# Altium PCB Glucometer-InstrumentationCircuit.PcbDoc
Units mm, origin at the board's own origin, x right, y up, seen from the top; angles counter-clockwise.
Board outline 24.26 x 43.36 mm, 2 copper layers (Top Layer, Bottom Layer); 11 components, 11 nets, 50 pads, 0 vias.
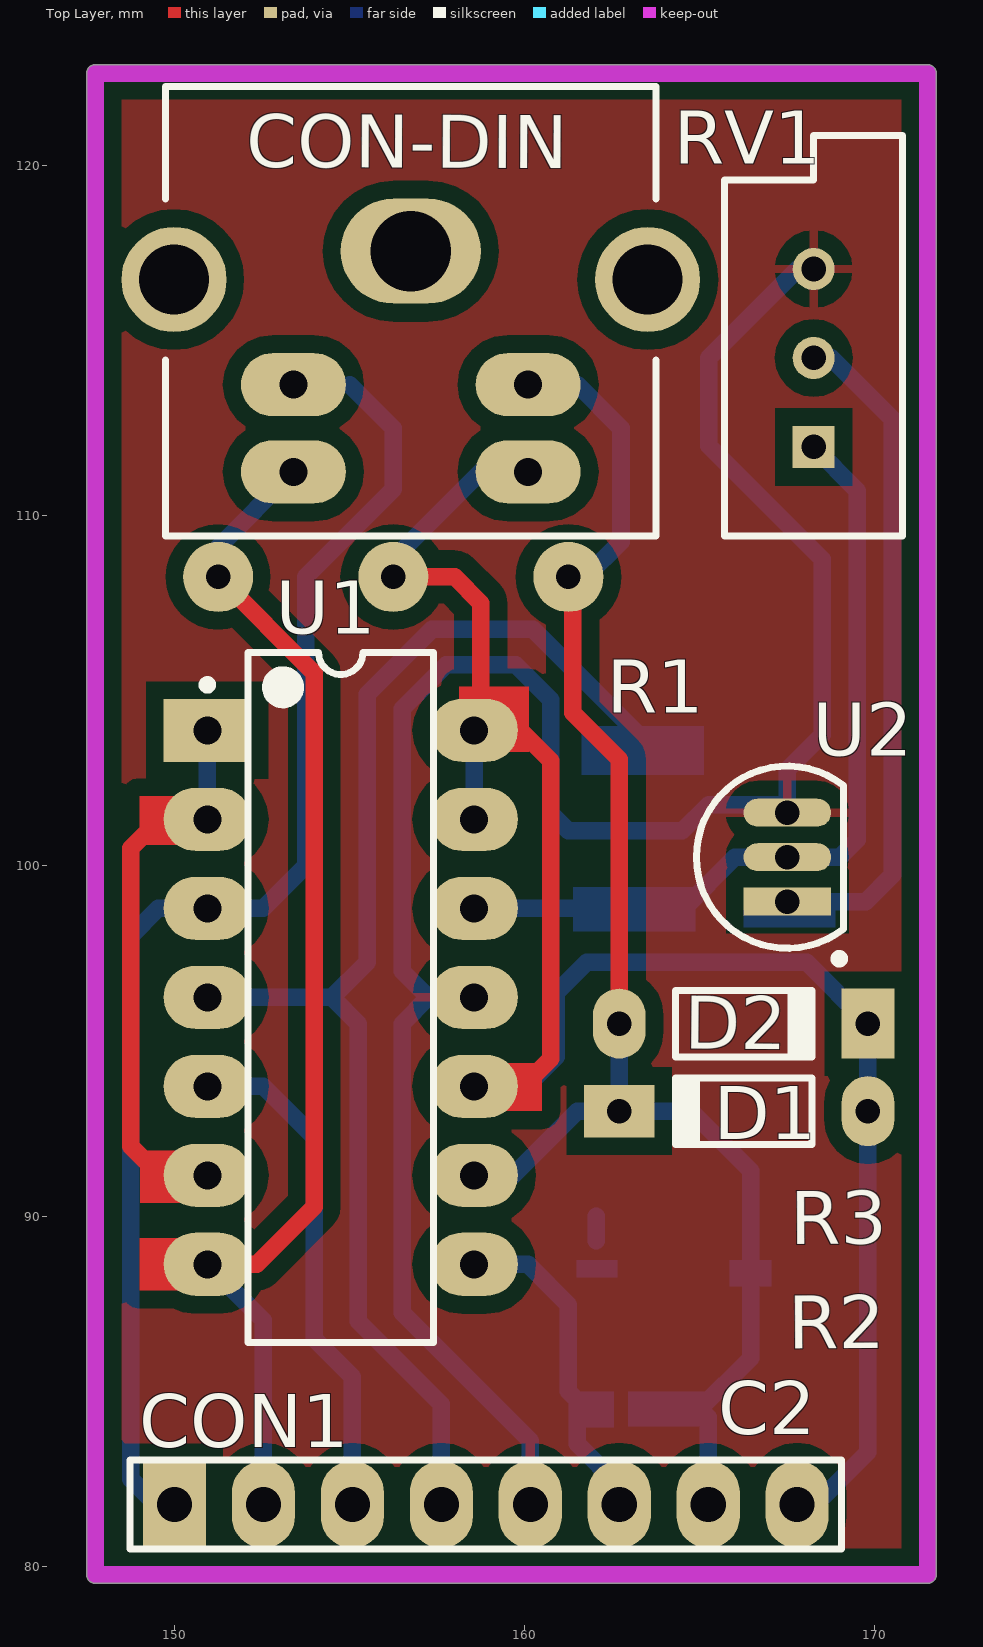
[diagram p0: Top Layer view]
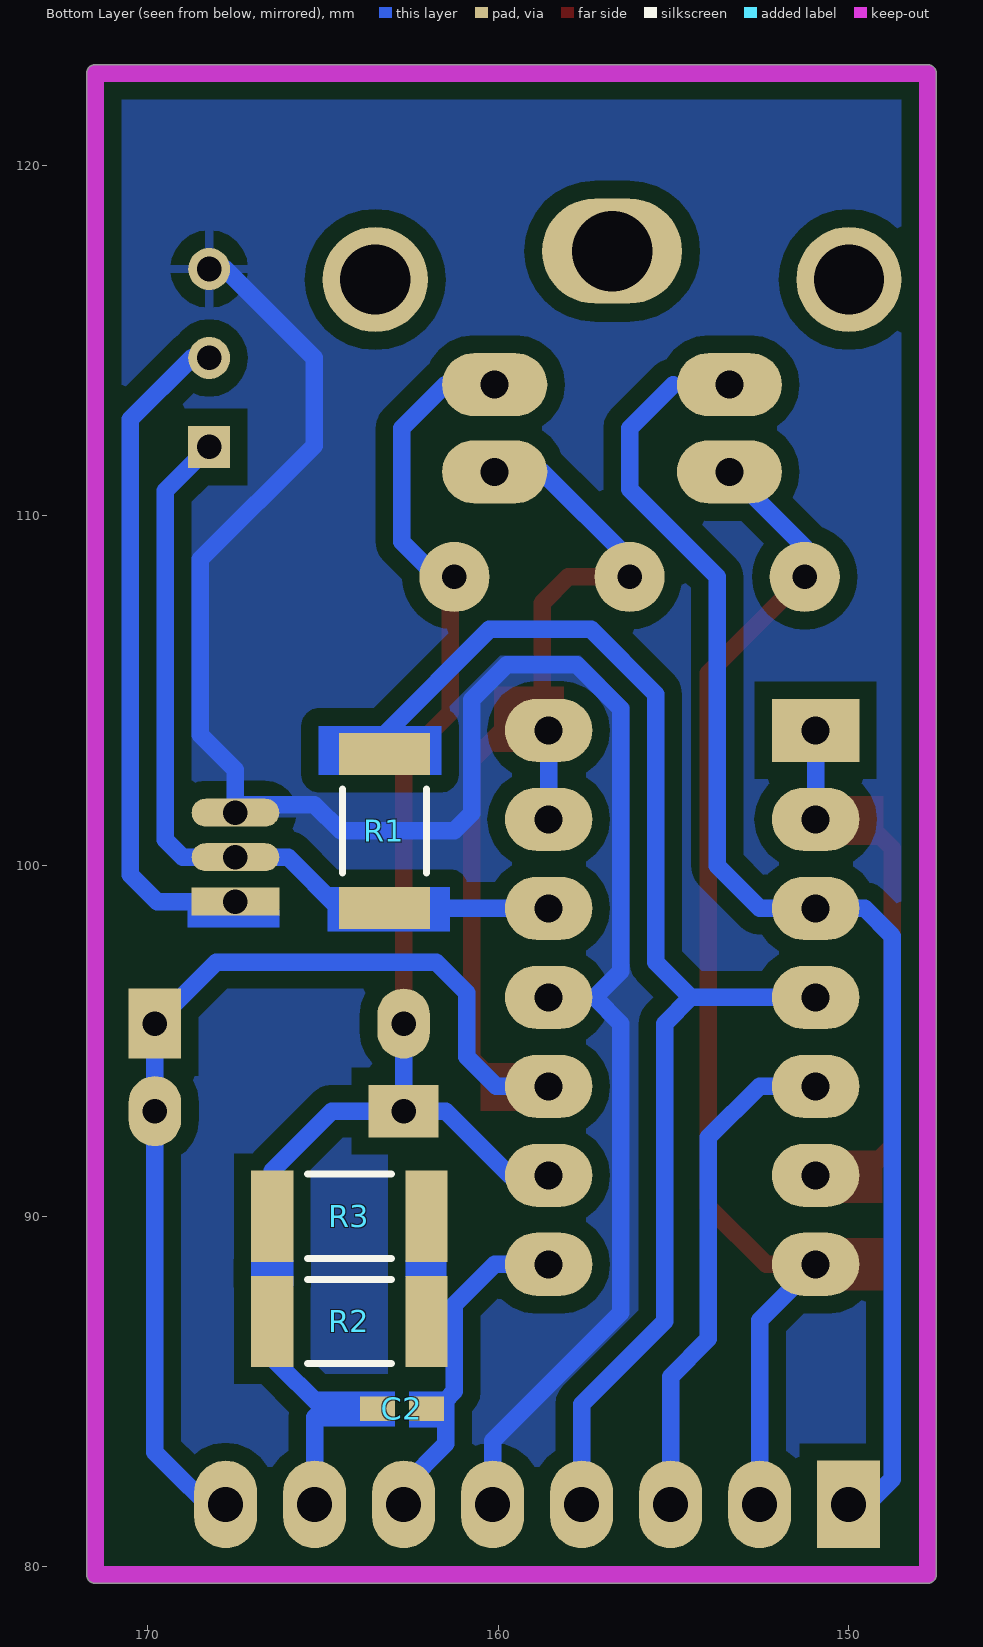
[diagram p1: Bottom Layer view, seen from below]

## Layer stack, top to bottom
Top Layer: signal copper 0.0356
Dielectric: dielectric 0.32, FR-4, Dk 4.8
Bottom Layer: signal copper 0.0356

## Board outline
147.495,79.77 ccw(c147.745,79.77) 147.745,79.52 171.5,79.52 ccw(c171.5,79.77) 171.75,79.77 171.75,122.625 ccw(c171.5,122.625) 171.5,122.875 147.745,122.875 ccw(c147.745,122.625) 147.495,122.625

## Design rules (kind name [scope] priority, off if disabled: settings)
AssemblyTestPointUsage AssemblyTestPointUsage_1 [All] p2:
AssemblyTestpoint AssemblyTestpoint_1 [All] p2: testpointundercomponent=TRUE minsize=1.016 maxsize=2.54 preferedsize=1.524 minholesize=0 maxholesize=1.016 preferedholesize=0.813 testpointgrid=0.025 usegrid=TRUE gridtolerance=0 allowsidetop=TRUE allowsidebottom=TRUE
Clearance [All] p1: gap=0.5
ComponentClearance ComponentClearance_1 [All] p2: gap=0.254 collisioncheckmode=3 verticalgap=0.254 showdistances=FALSE
DiffPairsRouting DiffPairsRouting_1 [All] p2: maxlimit=0.254 minlimit=0.254 mostfreqgap=0.254 maxuncoupledlength=12.7
FabricationTestPointUsage TestPointUsage [All] p2: valid=0 allowmultiple=FALSE
FabricationTestpoint Testpoint [All] p2: side=3 testpointundercomponent=TRUE minsize=1.016 maxsize=2.54 preferedsize=1.524 minholesize=0 maxholesize=1.016 preferedholesize=0.813 testpointgrid=0.025 allowsidetop=TRUE allowsidebottom=TRUE usegrid=TRUE gridtolerance=0
FanoutControl Fanout_LCC [IsLCC] p1: bgadir=Out bgaviamode=Centered fanoutstyle=Auto fanoutdirection=Alternating viagrid=0.025 // Fanout_LCC (Default Rule)
FanoutControl Fanout_BGA [IsBGA] p2: bgadir=Out bgaviamode=Centered fanoutstyle=Auto fanoutdirection=Alternating viagrid=0.025 // Fanout_BGA (Default Rule)
FanoutControl Fanout_Default [All] p4: bgadir=Out bgaviamode=Centered fanoutstyle=Auto fanoutdirection=Alternating viagrid=0.025 // Fanout_Default (Default Rule)
FanoutControl Fanout_Small [(CompPinCount < 5)] p5: bgadir=Out bgaviamode=Centered fanoutstyle=Auto fanoutdirection=OutThenIn viagrid=0.025 // Fanout_Small (Default Rule)
FanoutControl Fanout_BGA_1 [IsBGA] p6: bgadir=Out bgaviamode=Centered fanoutstyle=Auto fanoutdirection=Alternating viagrid=0.025 // Fanout_BGA (Default Rule)
FanoutControl Fanout_LCC_1 [IsLCC] p7: bgadir=Out bgaviamode=Centered fanoutstyle=Auto fanoutdirection=Alternating viagrid=0.025 // Fanout_LCC (Default Rule)
FanoutControl Fanout_SOIC_1 [IsSOIC] p8: bgadir=Out bgaviamode=Centered fanoutstyle=Auto fanoutdirection=Alternating viagrid=0.025 // Fanout_SOIC (Default Rule)
FanoutControl Fanout_Small_1 [(CompPinCount < 5)] p9: bgadir=Out bgaviamode=Centered fanoutstyle=Auto fanoutdirection=OutThenIn viagrid=0.025 // Fanout_Small (Default Rule)
FanoutControl Fanout_Default_1 [All] p10: bgadir=Out bgaviamode=Centered fanoutstyle=Auto fanoutdirection=Alternating viagrid=0.025 // Fanout_Default (Default Rule)
Height Height_1 [All] p2: minheight=0 maxheight=25.4 prefheight=12.7
HoleSize HoleSize_1 [All] p2: absolutevalues=TRUE maxlimit=2.54 minlimit=0.025 maxpercent=80.000 minpercent=20.000
HoleToHoleClearance HoleToHoleClearance_1 [All] p2: gap=0.254 allowstackedmicrovias=TRUE
LayerPairs LayerPairs_1 [All] p2: enforce=TRUE
MinimumSolderMaskSliver MinimumSolderMaskSliver_1 [All] p2: minsoldermaskwidth=0.254
NetAntennae NetAntennae_1 [All] p2: netantennaetolerance=0
PasteMaskExpansion PasteMaskExpansion_1 [All] p2: expansion=0
PlaneClearance PlaneClearance_1 [All] p2: clearance=0.508
PolygonConnect [All] p1: connectstyle=Relief reliefconductorwidth=0.254 reliefentries=4 polygonreliefangle="90 Angle" airgapwidth=0.254
PolygonConnect PolygonConnect_1 [All] p2: connectstyle=Relief reliefconductorwidth=0.254 reliefentries=4 polygonreliefangle="90 Angle" airgapwidth=0.254
RoutingPriority RoutingPriority_1 [All] p2: routingpriority=0
RoutingTopology RoutingTopology_1 [All] p2: topology=Shortest
RoutingVias [All] p1: holewidth=0.6 width=1.6 viastyle="Through Hole" minholewidth=0.711 minwidth=1.27 maxholewidth=0.711 maxwidth=1.27
ShortCircuit ShortCircuit_1 [All] p2: allowed=FALSE
SilkToSilkClearance SilkToSilkClearance_1 [All] p2: silktosilkclearance=0.254
SilkToSolderMaskClearance SilkscreenOverComponentPads [IsPad] p1: minsilkscreentomaskgap=0.254 clearancetoexposedcopper=TRUE
SilkToSolderMaskClearance SilkscreenOverComponentPads_1 [IsPad] p2: minsilkscreentomaskgap=0.254 clearancetoexposedcopper=TRUE
SolderMaskExpansion [All] p1: expansion=0.102
SolderMaskExpansion SolderMaskExpansion_1 [All] p2: expansion=0.102
UnRoutedNet UnRoutedNet_1 [All] p2:
Width [All] p1: maxlimit=0.5 minlimit=0.5 preferedwidth=0.5
23 further rules are at their usual default settings.

## Classes and differential pairs
component class Glucometer-InstrumentationCircuit-1: C2 CON1 D1 D2 R1 R2 R3 RV1 U1 U2

## Components (designator, comment, footprint, x,y, rotation, side; value= is the part's Value field where it differs from the comment)
C2 "Cap2" CAPC1005M 162.75,84.5 r180 bottom
CON1 "Header 8" HDR1X8 150,81.775 r0 top
CON-DIN "Comment" CDIN2.6-3H4 156.75,122.25 r270 top
D1 "1N4148" DO-35#1 166.25,93 r180 top
D2 "1N4148" DO-35#2 166.25,95.5 r0 top
R1 "Res1" 12Z-2010 163.25,101 r90 bottom
R2 "Res3" 12Z-2010 164.25,87 r180 bottom
R3 "Res3" 12Z-2010 164.25,90 r180 bottom
RV1 "RPot" VR5 168.25,114.5 r90 top
U1 "LMC6044IN" N14A 154.75,96.25 r0 top
U2 "LM385Z" Z03A 167.5,100.25 r0 top

## Footprints (in the part's own frame and the unit in brackets; to place one, negate y for a bottom-side part, rotate by r counter-clockwise, add the part's x,y. Pads: shape width x height; smd on the part's side, far side on the other; paste and mask are expansions set on the pad)
12Z-2010 [mm] "Chip Resistor, Body 5.0x2.5mm, IPC High Density"
  rect 1.2x2.6 smd: 1(-2.2,0) 2(2.2,0)
  silkscreen extent -1.2,-1.2 1.2,1.2, body extent -2.58,-1.33 2.58,1.33, height 0.9
CAPC1005M [mm] "Chip Capacitor, Body 1.0x0.5mm, IPC Low Density"
  rect 1x0.7 smd: 1(-0.7,0) 2(0.7,0)
  body extent -0.55,-0.3 0.55,0.3, height 0.6
CDIN2.6-3H4 [mm] "Connector; Circular DIN, Thru-Hole; 4 Position; Right Angle; Pitch 2.05/2.6 mm; Body 14 x 12.83 x 13 mm (WxTxH), Shielded, Special PCB Retention"
  oval 1.8x3 hole 0.8: 1(8.51,-3.35) 2(8.51,3.35) 3(11,-3.35) 4(11,3.35)
  round 3 hole 2: MH1(5.51,-6.76) MH3(5.51,6.76)
  oval 3x4 hole 2.3: MH2(4.7,0)
  silkscreen extent 0,-7 12.83,7, body extent 0,-7 12.83,7, height 13
DO-35#1 [mm] "Diode, Axial; Body 3.8 x 1.9 mm (LxDia. max), Lead Dia. 0.53 mm (max)"
  oval 1.5x2 hole 0.7: 1(-3.55,0)
  rect 2x1.5 hole 0.7: 2(3.55,0)
  silkscreen extent -1.95,-0.95 2.05,0.95
DO-35#2 [mm] "Diode, Axial; Body 3.8 x 1.9 mm (LxDia. max), Lead Dia. 0.53 mm (max)"
  oval 1.5x2 hole 0.7: 1(-3.55,0)
  rect 1.5x2 hole 0.7: 2(3.55,0)
  silkscreen extent -1.95,-0.95 2.05,0.95
HDR1X8 [mm] "Connector; Header; 8 Position"
  rect 1.8x2.5 hole 1: 1(0,0)
  oval 1.8x2.5 hole 1: 2(2.54,0) 3(5.08,0) 4(7.62,0) 5(10.16,0) 6(12.7,0) 7(15.24,0) 8(17.78,0)
  silkscreen extent -1.27,-1.27 19.05,1.27
N14A [mm] "DIP, 14-Leads, Row Spacing 7.62mm, Pitch 2.54mm, Body 19.56x6.35mm"
  rect 2.5x1.8 hole 0.8: 1(-3.81,7.62)
  oval 2.5x1.8 hole 0.8: 2(-3.81,5.08) 3(-3.81,2.54) 4(-3.81,0) 5(-3.81,-2.54) 6(-3.81,-5.08) 7(-3.81,-7.62) 8(3.81,-7.62) 9(3.81,-5.08) 10(3.81,-2.54) 11(3.81,0) 12(3.81,2.54) 13(3.81,5.08) 14(3.81,7.62)
  silkscreen extent -3.93,-9.85 2.65,9.85, body extent -3.55,-9.85 3.55,9.85, height 5.08
VR5 [mm] "Thru-Hole; 3 Leads"
  rect 1.2x1.2 hole 0.7: 1(-2.54,0)
  round 1.2 hole 0.7: 2(0,0) 3(2.54,0)
  silkscreen extent -5.08,-2.54 6.35,2.54
Z03A [mm] "TO, Flat Index; 3 In-Line, Axial Leads; Body Dia. 5mm; Leads 0.55 x 0.50 mm (max)"
  rect 2.5x0.8 hole 0.7: 1(0,-1.27)
  oval 2.5x0.8 hole 0.7: 2(0,0) 3(0,1.27)
  silkscreen extent -2.6,-3.02 1.61,2.6, body extent -2.61,-2.61 1.6,2.61, height 5.2

## Part data
C2: "Capacitor"
CON1: "Header, 8-Pin"
D1 D2: "High Conductance Fast Diode"
R1 R2 R3: "Resistor"
RV1: "Potentiometer"
U1: "CMOS Quad Micropower Operational Amplifier, 14-pin MDIP"
U2: "Adjustable Micropower Voltage Reference, 3-pin TO-92"

## Free pads (board coordinates)
  round 2 hole 0.7: 0(156.25,108.25) 1(161.25,108.25) 2(151.25,108.25)

## Nets (pads, with @x,y where several pads share a name; then routed paths per layer and width w, separated by ;. In a path a pad name is that pad's centre, name@x,y a point inside that pad or via, vN(x,y) a via of type N, cw(c..) or ccw(c..) an arc to the next point about the centre after c; other vN are vias at no path point)
GND: CON1.5 RV1.3 U1.11 U2.3 | length 60
  Bottom Layer w0.5: CON1.5@160.16,81.25 160.16,83.59 156.5,87.25 156.5,95.5 157.25,96.25 156.5,97 156.5,104.493 157.757,105.75 159.75,105.75 160.75,104.75 160.75,101.5 161.25,101 164.5,101 165.25,101.75 167.27,101.75 U2.3 167.5,102.75 168.5,103.75 168.5,108.75 165.25,112 165.25,114.5 167.79,117.04 RV1.3
NetC2_1: C2.1 CON1.7 CON-DIN.2 D1.2 D2.1 pad.1 R2.1 R3.1 U1.9 | length 45.7
  Top Layer w0.5: pad.1@161.375,108.125 161.375,104.375 162.7,103.05 D2.1
  Bottom Layer w0.5: U1.9 159.67,91.17 161.5,93 D1.2 ; CON-DIN.2 161.51,113.74 162.75,112.5 162.75,109.25 161.75,108.25 pad.1 ; D2.1 D1.2 ; C2.1 165,84.5 ; CON1.7@165.24,81.25 165.24,84.26 165,84.5 ; D1.2 164.75,93 166.45,91.3 R3.1 R2.1 166.45,85.95 165,84.5
NetC2_2: C2.2 CON1.6 R2.2 R3.2 U1.8 | length 11.3
  Bottom Layer w0.5: U1.8 160.095,88.63 161.25,87.475 161.25,85 161.5,84.75 ; C2.2 161.75,84.5 161.5,84.75 ; R3.2@162.05,89.3 R3.2 ; CON1.6@162.7,81.25 162.7,82.3 161.5,83.5 161.5,84.75
NetCON1_1: CON1.1 CON-DIN.1 U1.3 | length 38.4
  Bottom Layer w0.5: CON1.1@150,81.25 148.75,82.5 148.75,98 149.54,98.79 U1.3 152.54,98.79 153.75,100 153.75,108.25 156.25,110.75 156.25,112.5 155.01,113.74
NetCON1_2: CON1.2 CON-DIN.3 pad.2 U1.7 | length 34.8
  Top Layer w0.5: U1.7 152.355,88.63 154,90.275 154,105.5 pad.2
  Bottom Layer w0.5: U1.7 152.54,87.03 CON1.2@152.54,81.25 ; pad.2 151.25,109.1 CON-DIN.3
NetCON1_3: CON1.3 U1.5 | length 15.1
  Bottom Layer w0.5: U1.5 152.54,93.71 154,92.25 154,86.5 155.08,85.42 CON1.3@155.08,81.25
NetCON1_8: CON1.8 CON-DIN.4 D1.1 D2.2 pad.0 U1.10 U1.13 U1.14 | length 57.6
  Top Layer w0.5: pad.0 158,108.25 158.75,107.5 158.75,104.49 U1.14@159.37,103.87 ; U1.14 U1.14@159.37,103.87 ; U1.10@158.703,93.71 159.96,93.71 160.75,94.5 160.75,103 159.88,103.87 U1.14@159.37,103.87
  Bottom Layer w0.5: pad.0 156.25,108.75 158.75,111.25 CON-DIN.4 ; U1.10 160.06,93.71 160.9,94.55 160.9,96.375 161.775,97.25 168.05,97.25 D2.2 D1.1 169.8,83.27 CON1.8@167.78,81.25 ; U1.13 U1.14
NetR1_1: R1.1 RV1.1 U1.12 U2.2 | length 24.1
  Bottom Layer w0.5: U1.12 R1.1@163.49,98.79 ; R1.1 164.55,98.8 166,100.25 U2.2 169,100.25 169.5,100.75 169.5,110.71 RV1.1 ; U2.2@168.13,100.13 U2.2@168.37,100.37
NetRV1_3: RV1.2 U2.1 | length 19.3
  Bottom Layer w0.5: U2.1 169.73,98.98 170.5,99.75 170.5,112.75 168.75,114.5 RV1.2
NetU1_1: U1.1 U1.2 U1.6 | length 16
  Top Layer w0.5: U1.2@150.797,101.33 149.58,101.33 148.75,100.5 148.75,92 149.58,91.17 U1.6
  Bottom Layer w0.5: U1.2 U1.1
VCC: CON1.4 R1.2 U1.4 | length 39.2
  Bottom Layer w0.5: U1.4 154.5,96.25 ; CON1.4@157.62,81.25 157.62,84.63 155.25,87 155.25,95.5 154.5,96.25 ; R1.2 163.25,103.75 160.25,106.75 157.342,106.75 155.5,104.908 155.5,97.25 154.5,96.25
pads on no net: CON-DIN.MH1 CON-DIN.MH2 CON-DIN.MH3

## Polygon pours and split planes (outlines as drawn)
GND on Top Layer "Bottom Layer-No Net" (solid, remove dead copper, pour order 2): 147.745,122.425 147.945,122.625 171.5,122.625 171.5,79.77 147.745,79.77 147.745,122.625
GND on Bottom Layer "Bottom Layer-No Net" (solid, pour order 4): 147.745,122.625 171.5,122.625 171.5,79.77 147.745,79.77

## Keep-outs
Keep-Out Layer:
  lines w0.5: 147.745,79.77 171.5,79.77 171.5,122.625 147.745,122.625 147.745,79.77

## Other copper
Top Layer:
  rectangle net NetCON1_2: 149,87.875 151.775,89.375
  rectangle net NetU1_1: 149.025,90.375 151,91.875
  rectangle net NetU1_1: 149,100.6 150.95,102
  rectangle net NetCON1_8: 158.125,103.25 160.125,105.125
  rectangle net NetCON1_8: 158.55,93 160.5,94.375
Bottom Layer:
  rectangle net NetC2_2: 161.475,88.25 162.65,88.75
  rectangle net NetC2_1: 165.85,88 167.05,88.75
  rectangle net NetC2_1: 162.95,84 165.2,85
  rectangle net NetC2_2: 161.25,83.975 162.55,85
  rectangle net NetR1_1: 161.375,98.125 164.875,99.4
  rectangle net VCC: 161.625,102.6 165.125,104
  rectangle net NetRV1_3: 166.25,98.25 168.875,98.75

## Silkscreen, mask and mechanical layers (free items; w line width, h text height)
Mechanical 16:
  lines w0.127: 0,53.975 5.08,53.975 ; 0,107.95 5.08,107.95 ; 0,161.925 5.08,161.925 ; 69.85,0 69.85,5.08 ; 69.85,210.82 69.85,215.9 ; 139.7,0 139.7,5.08 ; 139.7,210.82 139.7,215.9 ; 209.55,0 209.55,5.08 ; 209.55,210.82 209.55,215.9 ; 274.32,53.975 279.4,53.975 ; 274.32,107.95 279.4,107.95 ; 274.32,161.925 279.4,161.925 ; 0,0 279.4,0 279.4,215.9 0,215.9 0,0 ; 5.08,5.08 5.08,210.82 274.32,210.82 274.32,5.08 5.08,5.08
  text "1" at 34.324,212.471 h1.78
  text "2" at 104.191,212.471 h1.78
  text "3" at 173.914,212.471 h1.78
  text "4" at 243.789,212.471 h1.78
  text "A" at 1.905,186.614 h1.78
  text "A" at 276.225,186.614 h1.78
  text "B" at 1.905,132.639 h1.78
  text "B" at 276.225,132.639 h1.78
  text "C" at 1.905,78.664 h1.78
  text "C" at 276.225,78.664 h1.78
  text "D" at 1.905,24.816 h1.78
  text "D" at 276.225,24.816 h1.78
  text "1" at 34.324,1.651 h1.78
  text "2" at 104.191,1.651 h1.78
  text "3" at 173.914,1.651 h1.78
  text "4" at 243.789,1.651 h1.78

## Dimensions
171.5,122.625 to 171.5,79.77 on Keep-Out Layer

## Text inside footprints (layer, text, board x,y; h text height)
CON-DIN: Mechanical 1 "PCB Edge" at 150.05,121.65 h0.25